# Altium PCB PCB_cronometroArduino.PcbDoc
Units mm, origin at the board's own origin, x right, y up, seen from the top; angles counter-clockwise.
Board outline 100 x 50 mm, 2 copper layers (Top Layer, Bottom Layer); 35 components, 37 nets, 120 pads, 0 vias.
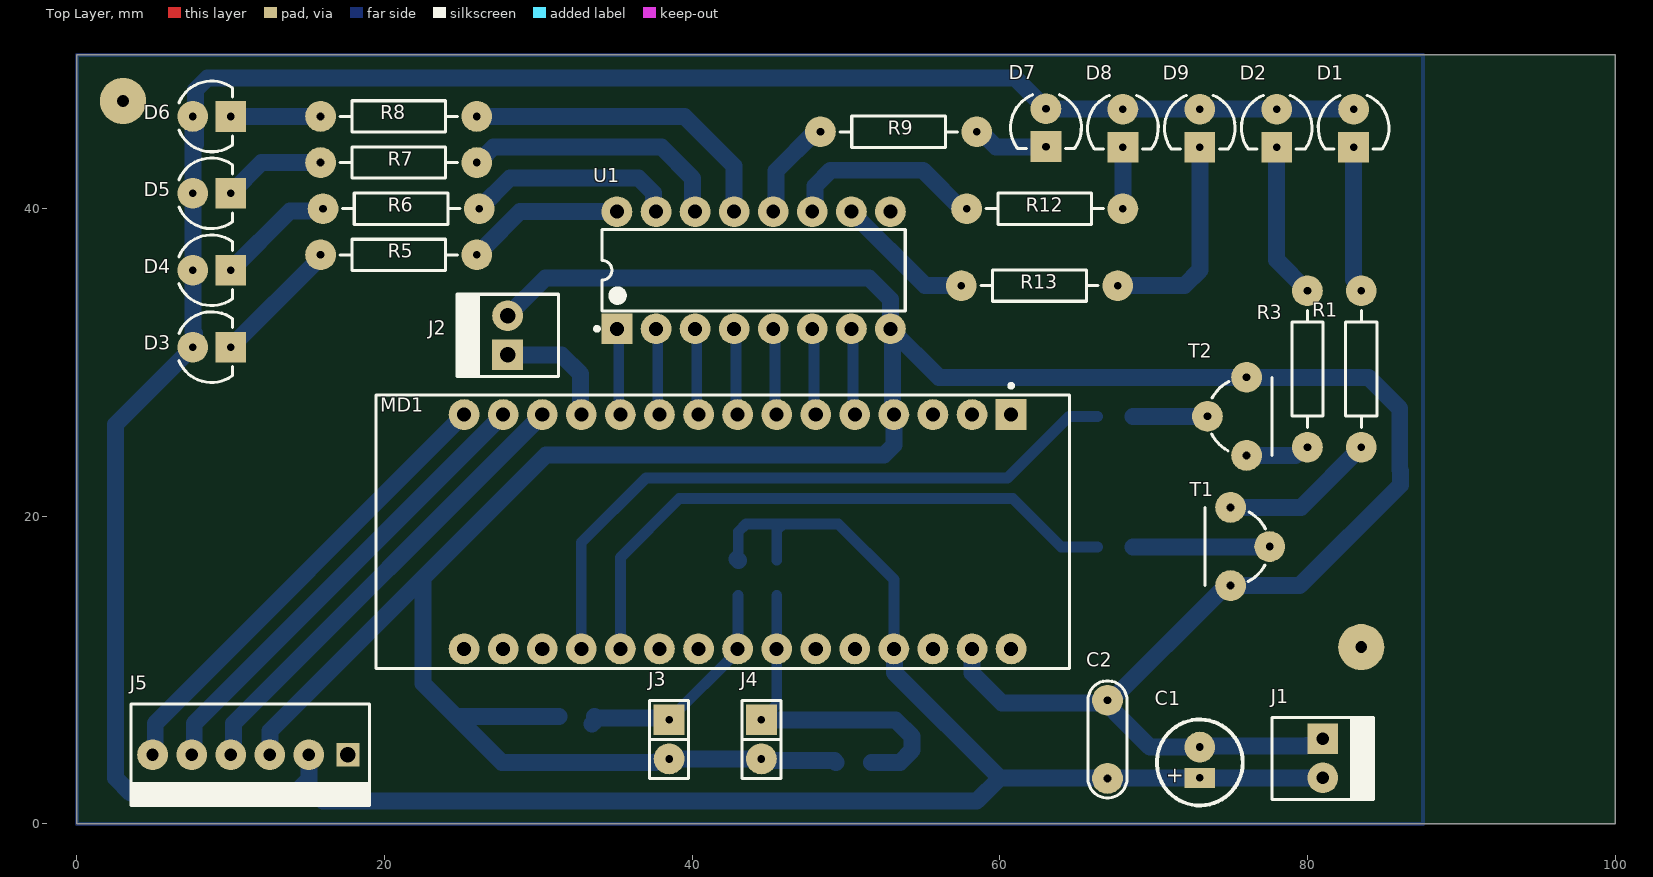
[diagram p0: Top Layer view]
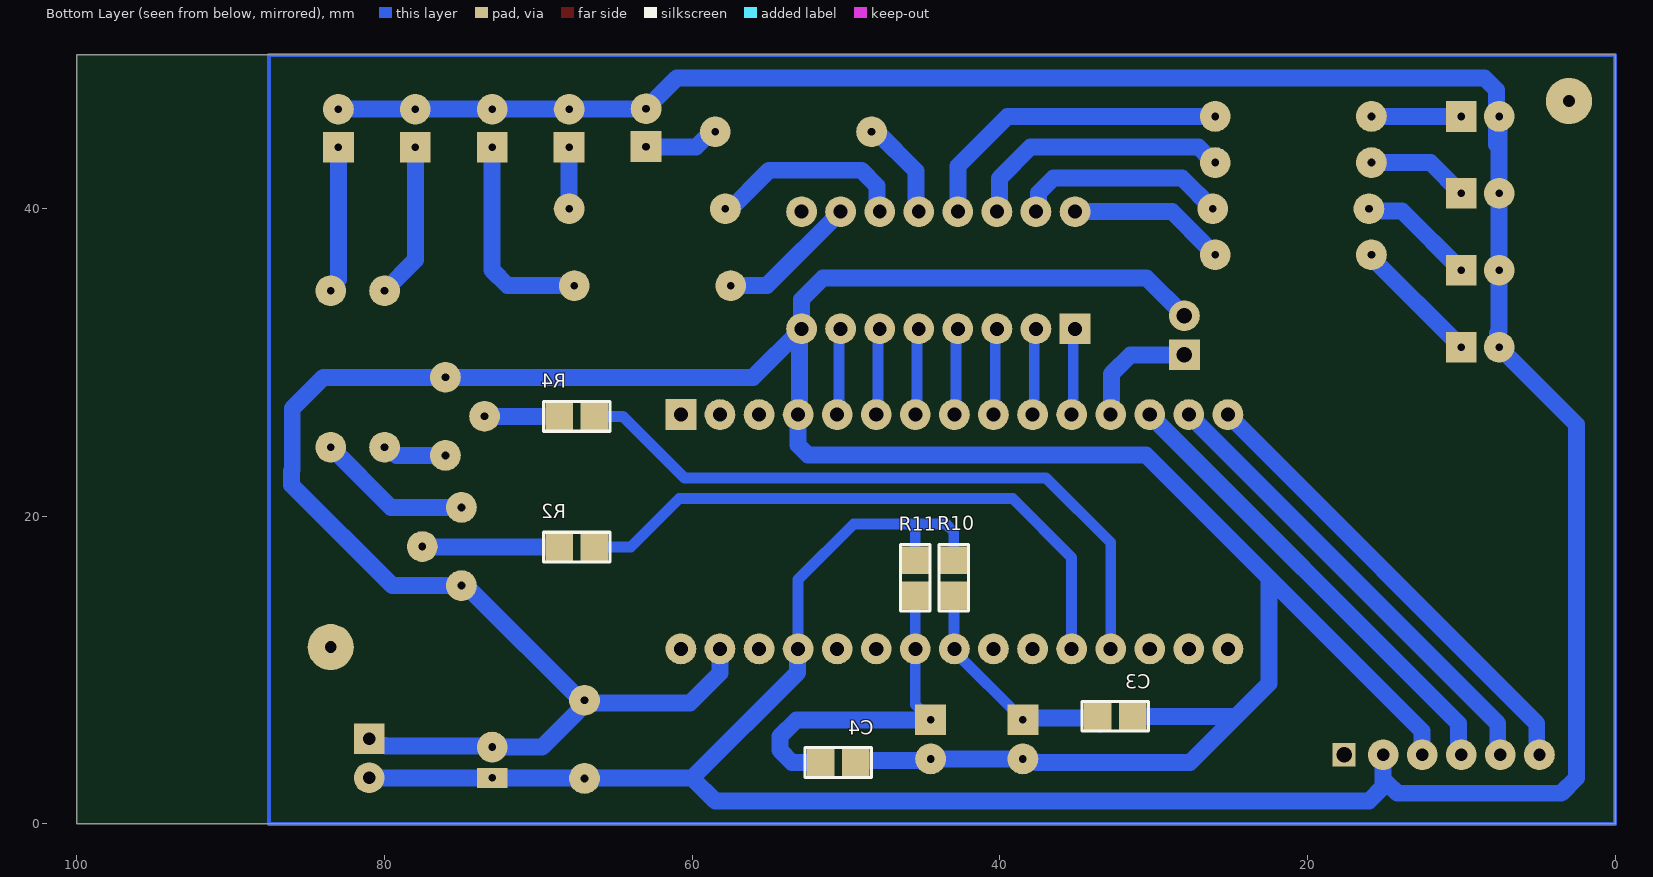
[diagram p1: Bottom Layer view, seen from below]

## Layer stack, top to bottom
Top Solder: solder mask 0.0102, Solder Resist, Dk 3.5
Top Layer: signal copper 0.0356
Dielectric 1: dielectric 0.32, FR-4, Dk 4.8
Bottom Layer: signal copper 0.0356
Bottom Solder: solder mask 0.0102, Solder Resist, Dk 3.5

## Board outline
0,0 0,50 100,50 100,0

## Design rules (kind name [scope] priority, off if disabled: settings)
Clearance [All] p1: gap=0.254 ignorepadtopadclearanceinfootprint=FALSE except(0: Arc-Hole Track-Hole SMDPad-Hole THPad-Hole Via-Hole Fill-Hole Poly-Hole Region-Hole Text-Hole)
PolygonConnect [All] p1: connectstyle=Relief reliefconductorwidth=0.254 reliefentries=4 polygonreliefangle="90 Angle" airgapwidth=0.254
RoutingVias [All] p1: holewidth=0.711 width=1.27 viastyle="Through Hole" minholewidth=0.711 minwidth=1.27 maxholewidth=0.711 maxwidth=1.27
SolderMaskExpansion [All] p1: expansion=0.102 istentingtop=FALSE
UnRoutedNet [All] p1: checkbadconnections=TRUE
Width [All] p1: maxlimit=5 minlimit=0.254 preferedwidth=1.1 toplayer_maxwidth=0.254 toplayer_prefwidth=0.254 bottomlayer_minwidth=0.5 minimp=50.000000 maximp=50.000000 favimp=50.000000
29 further rules are at their usual default settings.

## Components (designator, comment, footprint, x,y, rotation, side; value= is the part's Value field where it differs from the comment)
C1 "10u" CAP100RP 73,4 r90 top
C2 "100n" CAP200 67,5.5 r90 top
C3 "100n" 0805 32.5,7 r180 bottom
C4 "100n" 0805 50.5,4 r180 bottom
D1 "LED1" LED3 83,45.245 r270 top
D2 "LED2" LED3 78,45.245 r270 top
D3 "LED3" LED3 8.755,31 r0 top
D4 "LED4" LED3 8.755,36 r0 top
D5 "LED5" LED3 8.755,41 r0 top
D6 "LED6" LED3 8.755,46 r0 top
D7 "LED7" LED3 63,45.281 r270 top
D8 "LED8" LED3 68,45.245 r270 top
D9 "LED9" LED3 73,45.245 r270 top
J1 "Vcc" MOLEX2#1 81,5.54 r270 top
J2 "Buzzer" MOLEX2#2 28,30.5 r90 top
J3 "Button1" SIP2 38.5,5.5 r270 top
J4 "button2" SIP2 44.5,5.5 r270 top
J5 "MOLEX6" MOLEX6 17.62,4.5 r180 top
MD1 "ARDUINO_NANO" FP-A000005-MFG 42,19 r270 top
R1 "220" RES400 83.5,24.5 r90 top
R2 "4.7k" 0805 67.5,18 r0 bottom
R3 "220" RES400 80,24.5 r90 top
R4 "4.7k" 0805 67.5,26.5 r0 bottom
R5 "220" RES400 26,37 r180 top
R6 "220" RES400 26.16,40 r180 top
R7 "220" RES400 26,43 r180 top
R8 "220" RES400 26,46 r180 top
R9 "220" RES400 48.34,45 r0 top
R10 "10k" 0805 43,16 r270 bottom
R11 "10k" 0805 45.5,16 r270 bottom
R12 "220" RES400 57.84,40 r0 top
R13 "220" RES400 57.5,35 r0 top
T1 "BC547" TO92 76.27,18.04 r90 top
T2 "BC547" TO92 74.77,26.5 r270 top
U1 "ULN2003A" STM-DIP-16L 44,36 r90 top

## Footprints (in the part's own frame and the unit in brackets; to place one, negate y for a bottom-side part, rotate by r counter-clockwise, add the part's x,y. Pads: shape width x height; smd on the part's side, far side on the other; paste and mask are expansions set on the pad)
0805 [mm] "Pasivo 0805"
  rect 1.8x1.8 smd: 1(-1.143,0) 2(1.143,0)
  silkscreen extent -2.16,-0.97 2.16,0.97, body extent -1,-0.62 1,0.63, height 0.39
CAP100RP [mm] "Body diameter 5mm"
  rect 1.3x2 hole 0.5: 1(-1,0)
  round 2 hole 0.5: 2(1,0)
  silkscreen extent -2.79,-2.79 2.79,2.79, body extent -2.53,-2.51 2.53,2.54, height 11.53
CAP200 [mm]
  round 2 hole 0.5: 1(-2.54,0) 2(2.54,0)
  silkscreen extent -3.81,-1.27 3.81,1.27, body extent -2.79,-1.17 2.79,1.12, height 6.24
FP-A000005-MFG [mm]
  rect 2x2 hole 0.914 paste-1000 mask+0: 1(-7.62,18.732)
  round 2 hole 0.914 paste-1000 mask+0: 2(-7.62,16.192) 3(-7.62,13.652) 4(-7.62,11.112) 5(-7.62,8.572) 6(-7.62,6.032) 7(-7.62,3.492) 8(-7.62,0.952) 9(-7.62,-1.588) 10(-7.62,-4.128) 11(-7.62,-6.668) 12(-7.62,-9.208) 13(-7.62,-11.748) 14(-7.62,-14.287) 15(-7.62,-16.828) 16(7.62,-16.828) 17(7.62,-14.287) 18(7.62,-11.747) 19(7.62,-9.207) 20(7.62,-6.667) 21(7.62,-4.127) 22(7.62,-1.587) 23(7.62,0.953) 24(7.62,3.493) 25(7.62,6.033) 26(7.62,8.573) 27(7.62,11.113) 28(7.62,13.652) 29(7.62,16.192) 30(7.62,18.732)
  silkscreen extent -9.61,-22.54 8.89,22.54, body extent -9,-22.46 9,22.54, height 12.4
LED3 [mm]
  round 2 hole 0.5: 1(-1.219,0)
  rect 2x2 hole 0.5: 2(1.245,0)
  silkscreen extent -2.13,-2.3 1.36,2.3, body extent -1.65,-1.63 1.65,1.66, height 0.49
MOLEX2#1 [mm]
  rect 2x2 hole 0.8: 1(0,0)
  round 2 hole 0.8: 2(2.54,0)
  silkscreen extent -1.4,-3.3 3.94,3.3, body extent -1.27,-3.18 3.81,3.18, height 10.74
MOLEX2#2 [mm]
  rect 2x2 hole 1.016: 1(0,0)
  round 2 hole 1.016: 2(2.54,0)
  silkscreen extent -1.4,-3.3 3.94,3.3, body extent -1.27,-3.17 3.81,3.18, height 10.74
MOLEX6 [mm]
  rect 1.5x1.5 hole 1.016: 1(0,0)
  round 2 hole 0.8: 2(2.54,0) 3(5.08,0) 4(7.62,0) 5(10.16,0) 6(12.7,0)
  silkscreen extent -1.4,-3.3 14.1,3.3, body extent -1.27,-3.17 13.97,3.18, height 10.74
RES400 [mm]
  round 2 hole 0.5: 1(0,0) 2(10.16,0)
  silkscreen extent 1.27,-1.02 8.89,1.02, body extent -0.3,-1.14 10.46,1.17, height 2.43
SIP2 [mm]
  rect 2x2 hole 0.5: 1(-1.27,0)
  round 2 hole 0.5: 2(1.27,0)
  silkscreen extent -2.54,-1.27 2.54,1.27
STM-DIP-16L [mm] "DIP, 16-Leads, Body 19.7x7.1mm, Pitch 2.54mm"
  rect 2x2 hole 0.9: 1(-3.81,8.89)
  round 2 hole 0.9: 2(-3.81,6.35) 3(-3.81,3.81) 4(-3.81,1.27) 5(-3.81,-1.27) 6(-3.81,-3.81) 7(-3.81,-6.35) 8(-3.81,-8.89) 9(3.81,-8.89) 10(3.81,-6.35) 11(3.81,-3.81) 12(3.81,-1.27) 13(3.81,1.27) 14(3.81,3.81) 15(3.81,6.35) 16(3.81,8.89)
  silkscreen extent -3.93,-9.85 2.65,10.31, body extent -3.95,-9.85 3.95,9.85, height 5.33
TO92 [mm]
  round 2 hole 0.5: 1(0,-1.27) 2(2.54,1.27) 3(-2.54,1.27)
  silkscreen extent -2.54,-1 2.54,2.92, body extent -2.79,-1.55 2.79,2.79, height 8

## Part data
C1: library part CAPPOL
C2 C3 C4: library part CAP
D1 D2 D3 D4 D5 D6 D7 D8 D9: library part LED
J1: library part MOLEX2, "Tensión de alimentación"
J2: library part MOLEX2
J3 J4: library part CON2
MD1: library part CMP-189986-000002-1, "ARDUINO NANO ATMEGA328 EVAL BRD", Operating Supply Voltage=12V, Package Quantity=50, Core Architecture=AVR, Data Bus Width=8b, Evaluation Kit=Yes, Height=0.25inch, Interface=I2C, Length=7inch, Number of Bits=8, Packaging=Bulk, REACH SVHC="No SVHC", Series="AVR® ATmega", Weight=0.358383oz, Width=5inch
R1 R2 R3 R4 R5 R6 R7 R8 R9 R10 R11 R12 R13: library part RES
T1 T2: library part "TRANSISTOR NPN"
U1: library part CMP-2000-07351-1, "Seven Darlington Array, 50 V, 0.5 A, -40 to 85 degC, 16-Pin DIP, RoHS, Tube", Collector Emitter Voltage V(br)ceo=50V, DC Collector Current=500mA, DC Current Gain hFE=1000hFE, Manufacturer=STMicroelectronics, Operating Temperature Max=85°C, Output Current=0.5A, Package Description="16-Pin DIP, Body 19.7 x 7.1 mm, Pitch 2.54 mm", Package Reference=DIP-16L, Power Dissipation Pd=-, Transistor Case Style=DIP, Automotive Qualification Standard=-, Datasheet URL=http://www2.st.com/content/ccc/resource/technical/document/datasheet/f3/6e/c8/64/4d/b3/4e/38/CD00001244.pdf/files/CD00001244.pdf/jcr:content/translations/en.CD00001244.pdf, Datasheet Version="Rev. 8, 06/2012", Manufacturer URL=http://www.st.com/, Mounting Technology=ThroughHole, MSL=MSL2-1year, No. of Pins=16Pins, PartNumber=ULN2003A, Product Range=-, SVHC=NoSVHC(17-Dec-2015), Transistor Polarity=NPN, VOUT=50V

## Free pads (board coordinates)
  round 3 hole 0.762: 2(3,47) 2(83.5,11.5)

## Nets (pads, with @x,y where several pads share a name; then routed paths per layer and width w, separated by ;. In a path a pad name is that pad's centre, name@x,y a point inside that pad or via, vN(x,y) a via of type N, cw(c..) or ccw(c..) an arc to the next point about the centre after c; other vN are vias at no path point)
+5: C1.1 C2.1 D1.1 D2.1 D3.1 D4.1 D5.1 D6.1 D7.1 D8.1 D9.1 J1.2 J5.2 MD1.27 R10.1 R11.1 | length 238.5
  Bottom Layer w0.7: R10.1 43,19 43.5,19.5 45.91,19.5 ; R11.1 45.5,19.09 45.91,19.5 ; MD1.27 53.112,15.887 49.5,19.5 45.91,19.5
  Bottom Layer w1.1: D3.1 2.5,25.964 2.5,3 3.5,2 14.158,2 14.802,2.644 ; D3.1@7.646,31.89 7.536,32 D4.1 D5.1 D6.1 D6.1@7.708,46.172 ; 7.708,44.172 D6.1@7.708,46.172 ; J5.2 15.08,2.42 16,1.5 58.5,1.5 60,3 ; R10.1@42.91,17.233 R10.1 ; MD1.27 53.14,11.352 53.14,9.86 60,3 ; J1.2 C1.1 66,3 60,3 ; D1.1 82.982,46.482 78,46.482 63.018,46.482 D7.1 61,48.5 8.5,48.5 7.708,47.708 D6.1@7.708,46.172
button1-yellow: C3.1 J3.1 MD1.23 R10.2 | length 15.1
  Bottom Layer w0.7: J3.1 42.952,11.222 MD1.23 42.976,11.404 42.976,14.833 R10.2
  Bottom Layer w1.1: C3.1@33.5,6.5 C3.1@33.635,6.635 ; C3.1 33.758,6.885 38.385,6.885 J3.1
button2-red: C4.1 J4.1 MD1.24 R11.2 | length 22.6
  Bottom Layer w0.7: J4.1 45.492,7.762 MD1.24 45.496,11.384 45.496,14.853 R11.2
  Bottom Layer w1.1: J4.1 53.23,6.77 54.294,5.706 54.294,4.794 53.5,4 C4.1
Buzzer: J2.1 MD1.12 | length 8.1
  Bottom Layer w1.1: J2.1 31.5,30.5 32.73,29.27 32.73,26.682 MD1.12 MD1.12@32.951,26.779
CLK: J5.6 MD1.15 | length 30.5
  Bottom Layer w1.1: J5.6 5.092,4.672 5.092,6.54 MD1.15
CS: J5.5 MD1.14 | length 30.5
  Bottom Layer w1.1: J5.5 7.632,4.672 7.632,6.528 27.712,26.609 MD1.14
Din: J5.4 MD1.13 | length 30.5
  Bottom Layer w1.1: J5.4 10.172,4.672 10.172,6.528 30.252,26.609 MD1.13
GND: C1.2 C2.2 C3.2 C4.2 J1.1 J2.2 J3.2 J4.2 J5.3 MD1.4 MD1.29 T1.3 T2.3 U1.8 | length 220.1
  Bottom Layer w1.1: J5.3 12.544,4.504 12.544,6.044 22.5,16 ; J2.2 30.46,35.5 51.5,35.5 52.89,34.11 U1.8 ; C3.2 24.644,7 ; C4.2 49.242,4.115 44.615,4.115 J4.2 J3.2 38.328,4.058 37.691,4.058 37.634,4 27.644,4 24.644,7 ; U1.8@52.901,32.19 56.051,29.04 T2.3 83.96,29.04 86,27 86,23 86.044,22.956 86.044,22.044 79.5,15.5 T1.3 74.828,15.328 74.531,15.328 C2.2@67.002,7.799 ; U1.8@53.013,31.977 53.013,26.719 MD1.4 53.112,24.644 52.468,24 30.5,24 22.5,16 ; MD1.29 58.192,9.808 60.132,7.868 66.759,7.868 67.002,7.624 67.172,7.624 67.45,7.346 67.45,7.298 69.748,5 C1.2 73.061,5.061 79.906,5.061 79.935,5.09 80.55,5.09 J1.1 ; 22.5,16 22.5,9.144 24.644,7
led1: MD1.20 R2.1 | length 39.9
  Bottom Layer w0.7: MD1.20 35.332,17.333 39.154,21.154 60.846,21.154 64,18 R2.1
led2: MD1.19 R4.1 | length 43.9
  Bottom Layer w0.7: MD1.19 32.792,18.293 37,22.5 60.5,22.5 64.5,26.5 R4.1
led3: MD1.11 U1.1 | length 5.7
  Bottom Layer w0.7: U1.1 35.221,32.079 35.221,26.731 MD1.11
led4: MD1.10 U1.2 | length 5.7
  Bottom Layer w0.7: U1.2 37.761,32.079 37.761,26.731 MD1.10
led5: MD1.9 U1.3 | length 5.7
  Bottom Layer w0.7: U1.3 40.301,32.079 40.301,26.731 MD1.9
led6: MD1.8 U1.4 | length 5.7
  Bottom Layer w0.7: U1.4 42.841,32.079 42.841,26.731 MD1.8
led7: MD1.7 U1.5 | length 5.7
  Bottom Layer w0.7: U1.5 45.381,32.079 45.381,26.731 MD1.7
led8: MD1.6 U1.6 | length 5.7
  Bottom Layer w0.7: U1.6 47.921,32.079 47.921,26.731 MD1.6
led9: MD1.5 U1.7 | length 5.7
  Bottom Layer w0.7: U1.7 50.461,32.079 50.461,26.731 MD1.5
NetD1_2: D1.2 R1.2 | length 9.5
  Bottom Layer w1.1: D1.2 83,35.404 83.5,34.904 R1.2
NetD2_2: D2.2 R3.2 | length 10.2
  Bottom Layer w1.1: D2.2 78,36.66 R3.2
NetD3_2: D3.2 R5.2 | length 8.4
  Bottom Layer w1.1: D3.2 15.84,36.84 R5.2
NetD4_2: D4.2 R6.2 | length 7.7
  Bottom Layer w1.1: D4.2 13.85,39.85 15.85,39.85 R6.2
NetD5_2: D5.2 R7.2 | length 6.7
  Bottom Layer w1.1: D5.2 12,43 R7.2
NetD6_2: D6.2 R8.2 | length 5
  Bottom Layer w1.1: D6.2 R8.2@15,46
NetD7_2: D7.2 R9.2 | length 4.9
  Bottom Layer w1.1: R9.2 58.744,45 59.744,44 62.964,44 D7.2
NetD8_2: D8.2 R12.2 | length 4
  Bottom Layer w1.1: R12.2 D8.2
NetD9_2: D9.2 R13.2 | length 13.8
  Bottom Layer w1.1: R13.2 72,35 73,36 D9.2
NetR1_1: R1.1 T1.2 | length 10.1
  Bottom Layer w1.1: T1.2 79.58,20.58 R1.1
NetR2_2: R2.2 T1.1 | length 8.1
  Bottom Layer w1.1: R2.2 T1.1@76.77,18
NetR3_1: R3.1 T2.2 | length 4.2
  Bottom Layer w1.1: T2.2 79.216,23.96 79.756,24.5 R3.1
NetR4_2: R4.2 T2.1 | length 4.9
  Bottom Layer w1.1: R4.2 T2.1
NetR5_1: R5.1 U1.16 | length 9.6
  Bottom Layer w1.1: R5.1@26.452,37.452 28.81,39.81 U1.16
NetR6_1: R6.1 U1.15 | length 13.8
  Bottom Layer w1.1: R6.1 28.16,42 36.5,42 37.478,41.022 37.478,39.982 U1.15
NetR7_1: R7.1 U1.14 | length 17.6
  Bottom Layer w1.1: R7.1@25.885,43.385 26.023,43.247 26.341,43.247 27.094,44 38,44 40.018,41.982 40.018,39.982 U1.14
NetR8_1: R8.1 U1.13 | length 21
  Bottom Layer w1.1: R8.1 39.5,46 42.73,42.77 U1.13
NetR9_1: R9.1 U1.12 | length 6.3
  Bottom Layer w1.1: U1.12 45.442,39.982 45.442,42.442 R9.1@48,45
NetR12_1: R12.1 U1.11 | length 13
  Bottom Layer w1.1: U1.11 47.982,39.982 47.982,41.482 49,42.5 55,42.5 R12.1@57.67,39.83
NetR13_1: R13.1 U1.10 | length 9.1
  Bottom Layer w1.1: U1.10 50.35,39.799 55.149,35 R13.1
pads on no net: J5.1 MD1.1 MD1.2 MD1.3 MD1.16 MD1.17 MD1.18 MD1.21 MD1.22 MD1.25 MD1.26 MD1.28 MD1.30 U1.9
copper on no net: | length 275
  Bottom Layer w0.254: 0,0 87.5,0 87.5,50 0,50 0,0

## Text inside footprints (layer, text, board x,y; h text height)
C1: Top Overlay "+" at 71.832,2.552 h1.02 r90